# Altium PCB PCB1.PcbDoc
Units mm, origin at the board's own origin, x right, y up, seen from the top; angles counter-clockwise.
Board outline 89.79 x 66.55 mm, 2 copper layers (Top Layer, Bottom Layer); 40 components, 43 nets, 176 pads, 86 vias.
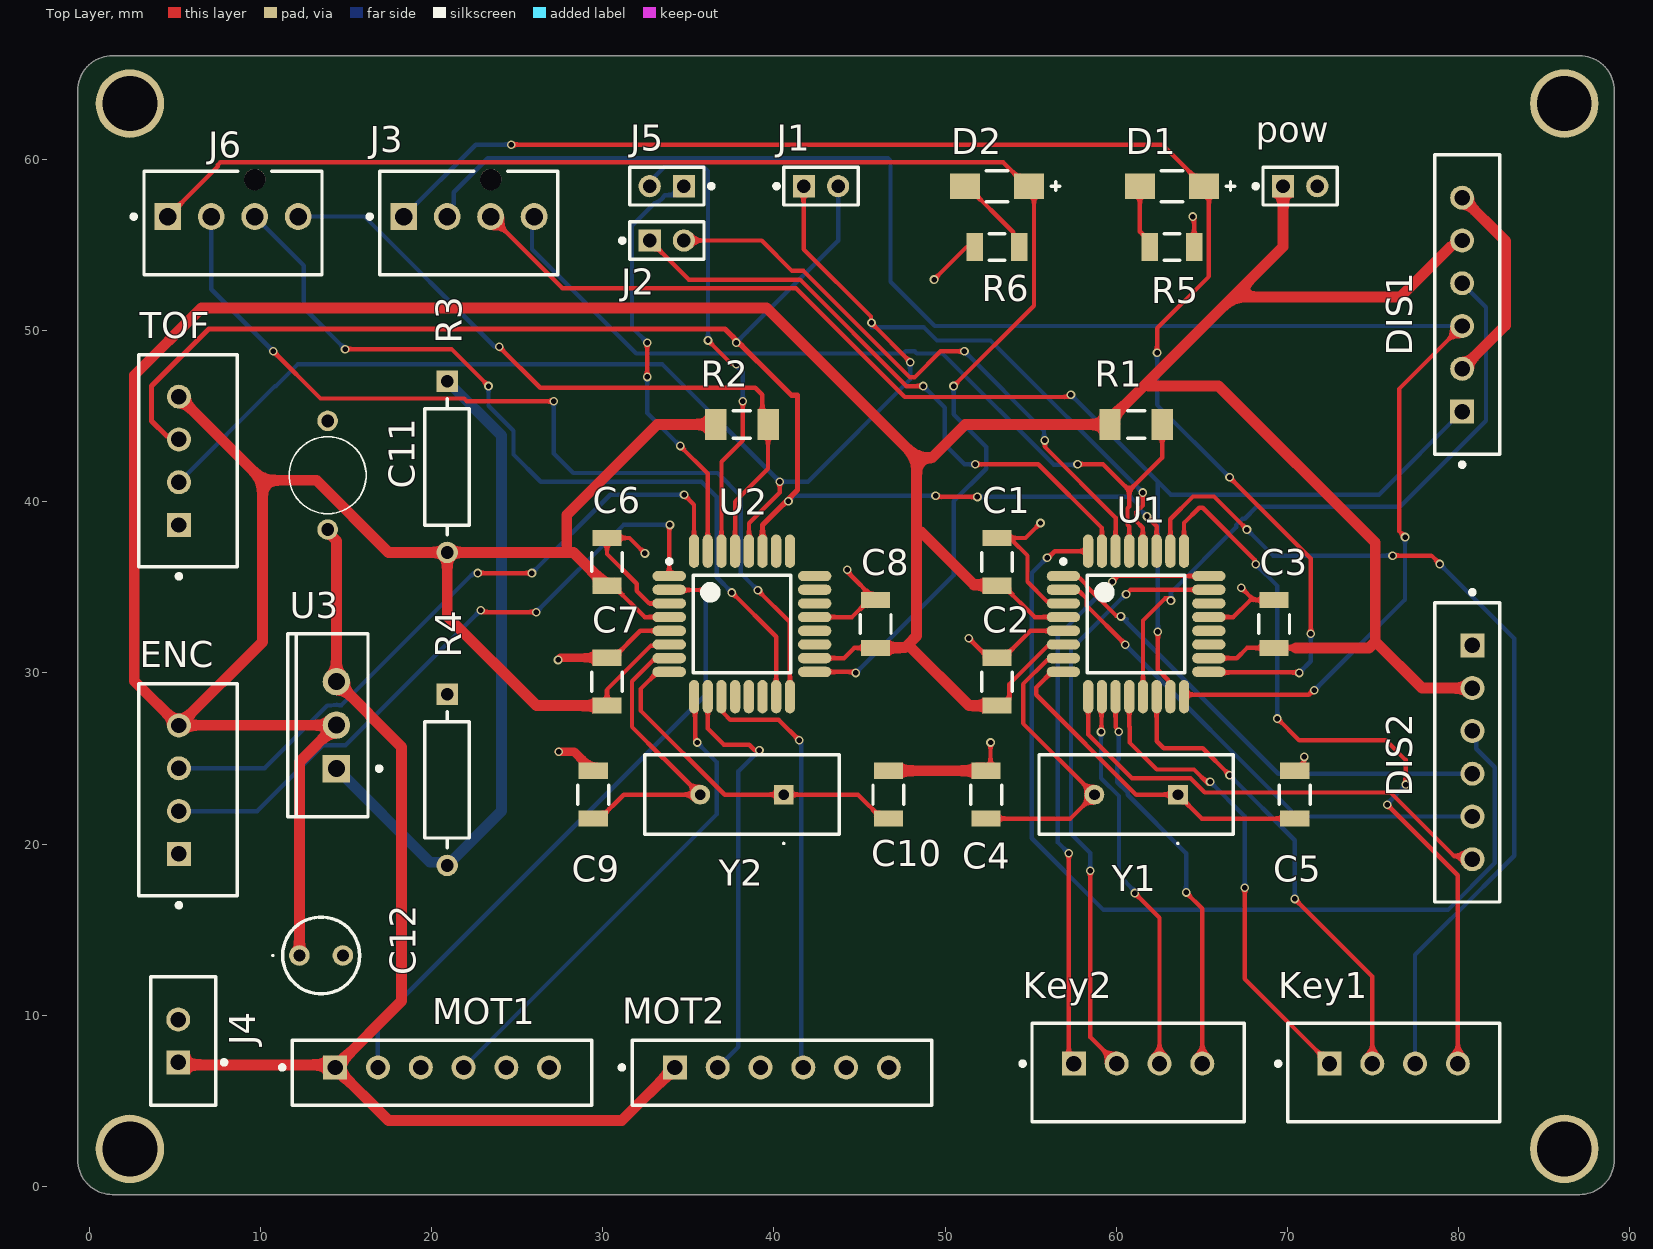
[diagram p0: Top Layer view]
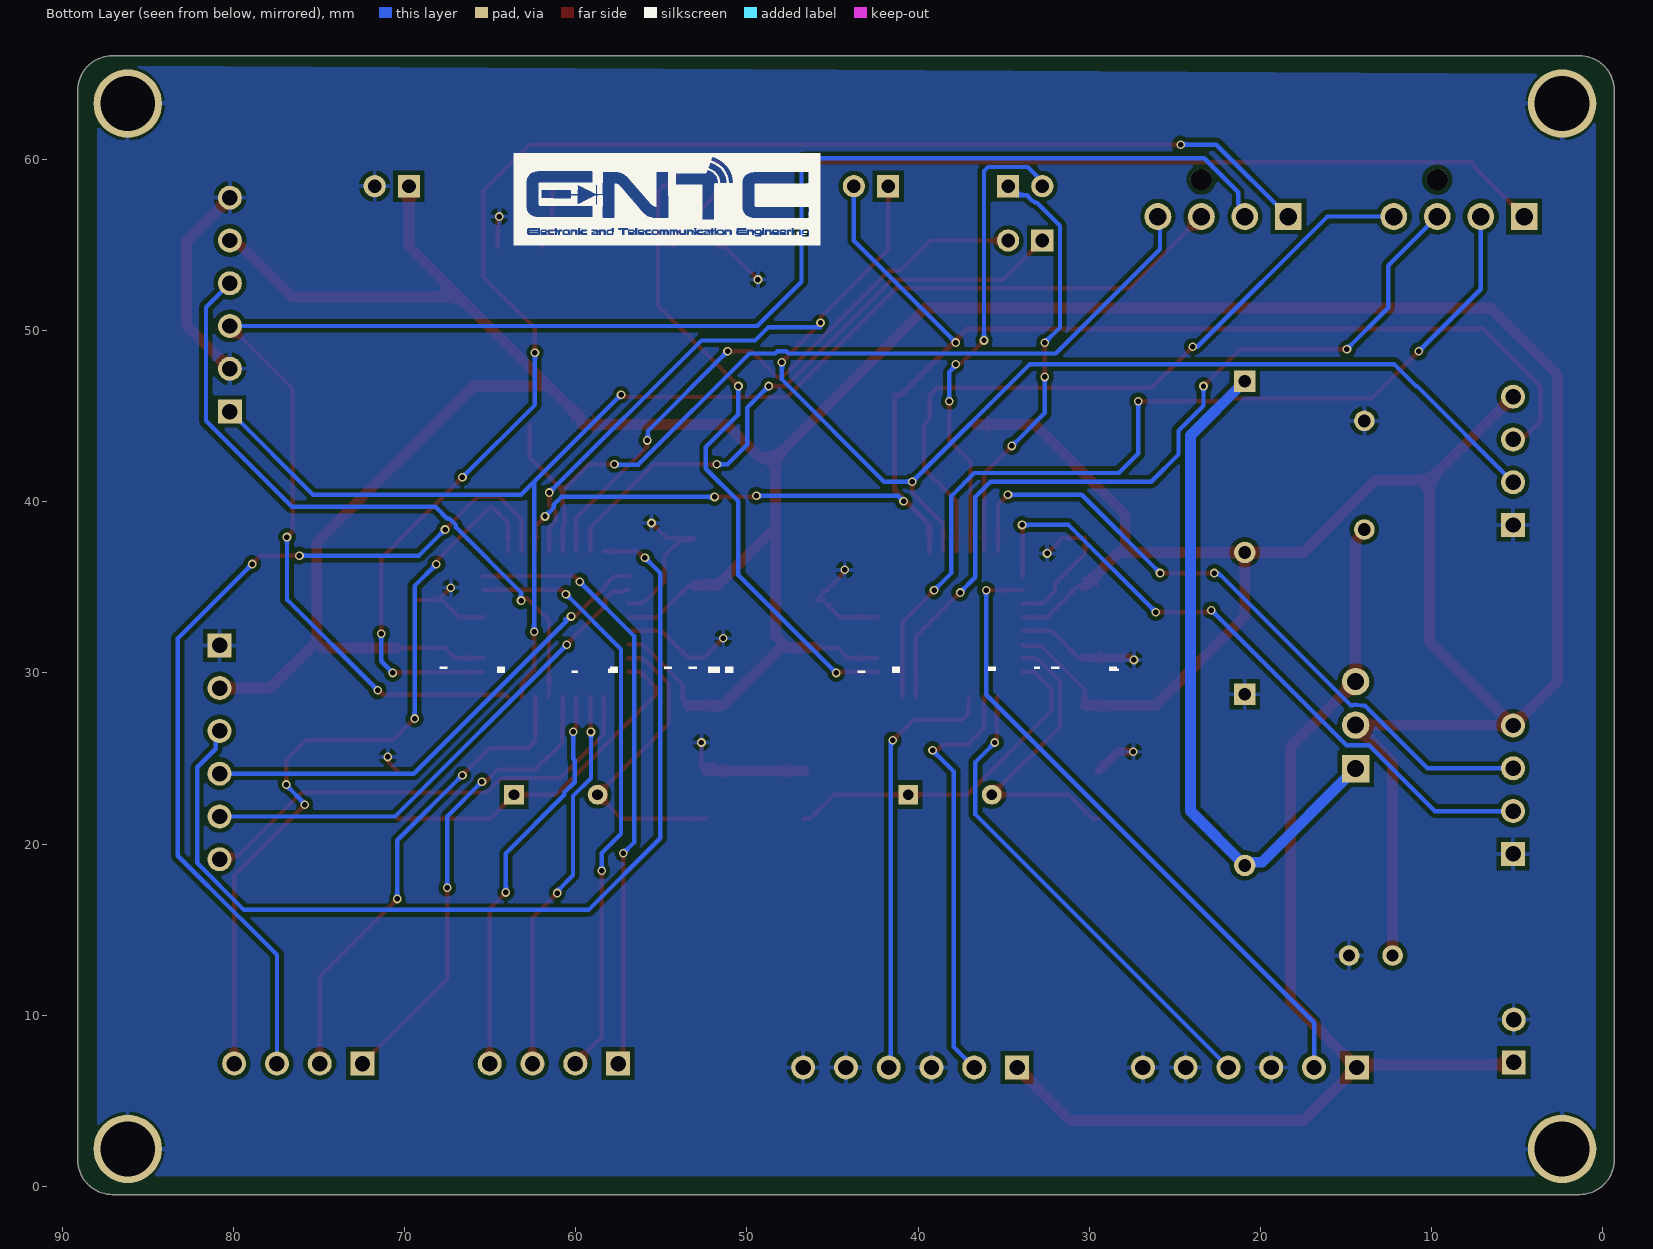
[diagram p1: Bottom Layer view, seen from below]
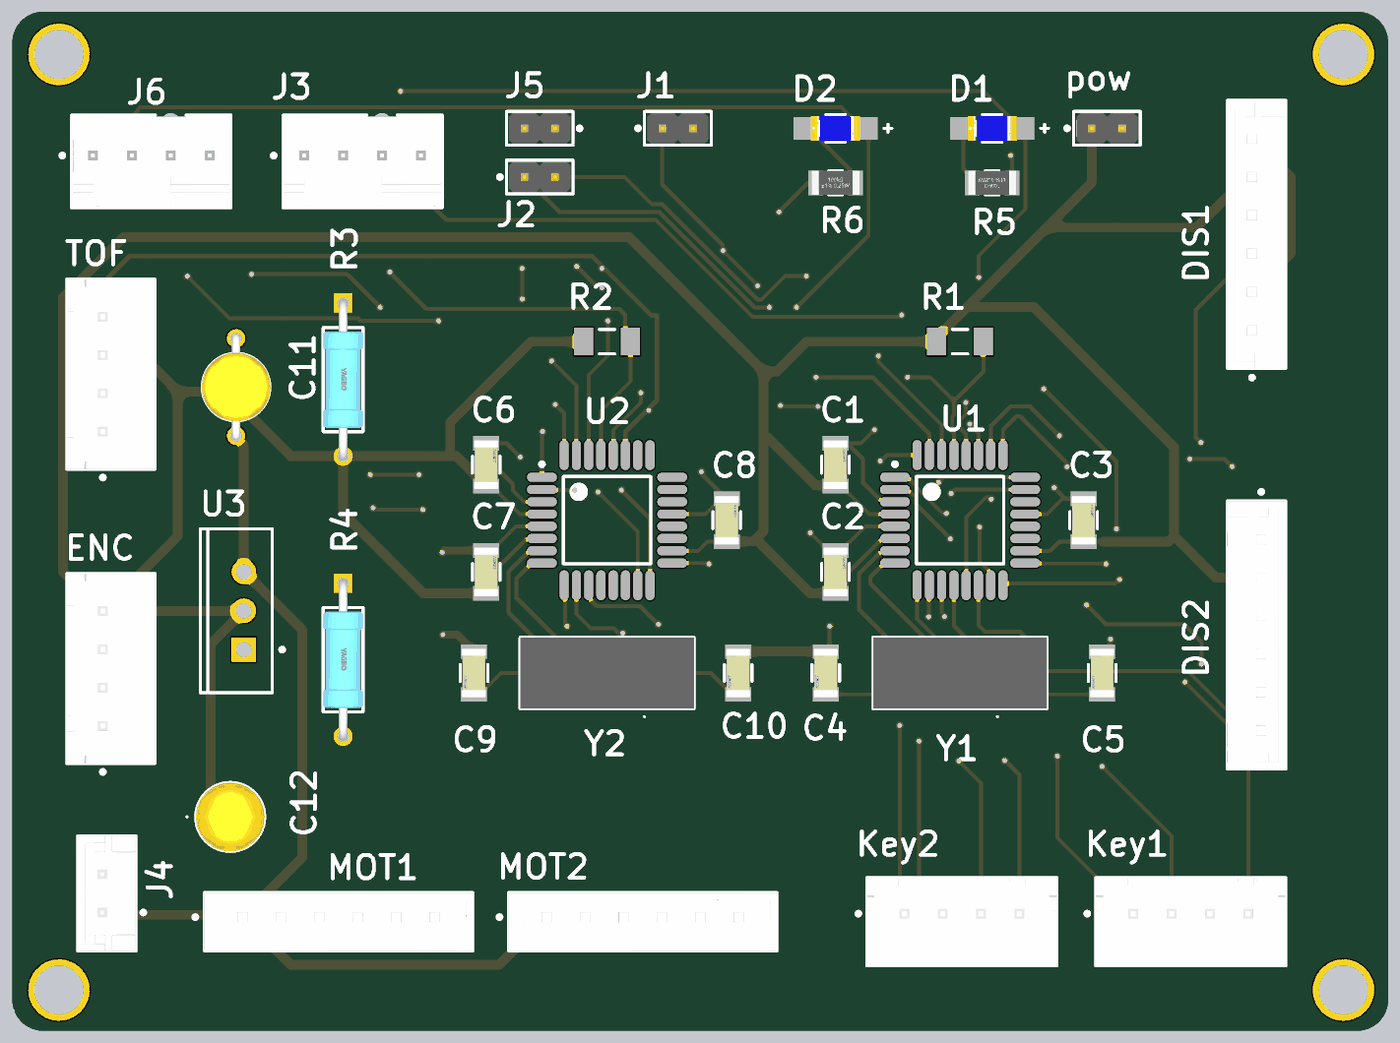
[diagram p2: 3D render of the assembled board from above, using the file's embedded part models]

## Layer stack, top to bottom
Top Solder: solder mask 0.0102, Solder Resist, Dk 3.5
Top Layer: signal copper 0.0356
Dielectric 1: dielectric 0.32, FR-4, Dk 4.8
Bottom Layer: signal copper 0.0356
Bottom Solder: solder mask 0.0102, Solder Resist, Dk 3.5

## Board outline
-0.684,1.551 -0.684,64.035 cw(c1.348,64.035) 1.348,66.067 87.073,66.067 cw(c87.073,64.035) 89.105,64.035 89.105,1.551 cw(c87.073,1.551) 87.073,-0.481 1.348,-0.481 cw(c1.348,1.551)

## Design rules (kind name [scope] priority, off if disabled: settings)
Clearance [All] p1: gap=0.254 ignorepadtopadclearanceinfootprint=TRUE except(0: Arc-Hole Track-Hole SMDPad-Hole THPad-Hole Via-Hole Fill-Hole Poly-Hole Region-Hole Text-Hole)
PolygonConnect [All] p1: connectstyle=Relief reliefconductorwidth=0.254 reliefentries=4 polygonreliefangle="90 Angle" airgapwidth=0.254
RoutingVias [All] p1: holewidth=0.254 width=0.508 viastyle="Through Hole" minholewidth=0.254 minwidth=0.508 maxholewidth=3.251 maxwidth=3.81
SolderMaskExpansion [All] p1: expansion=0.102 istentingtop=FALSE
Width [InNet('NetC11_1')] p1: maxlimit=0.635 minlimit=0.635 preferedwidth=0.635 minimp=50.000000 maximp=50.000000 favimp=50.000000
30 further rules are at their usual default settings.

## Classes and differential pairs
component class power: C11 C12 J4 pow R3 R4 U3
component class slave: C6 C7 C8 C9 C10 D2 ENC J5 J6 MOT1 MOT2 R2 R6 U2 Y2
component class master: C1 C2 C3 C4 C5 D1 DIS1 DIS2 J1 J2 J3 Key1 Key2 R1 R5 TOF U1 Y1

## Components (designator, comment, footprint, x,y, rotation, side; value= is the part's Value field where it differs from the comment)
C1 "C1206C224J5RACTU" FP-C1206C-EB-MFG 53.037,36.488 r270 top value="0.22 μF"
C2 "C1206C224J5RACTU" FP-C1206C-EB-MFG 53.037,29.491 r270 top value="0.22 μF"
C3 "C1206C224J5RACTU" FP-C1206C-EB-MFG 69.226,32.863 r270 top value="0.22 μF"
C4 "22pf" FP-C1206C-EB-MFG 52.402,22.887 r90 top value="22 pF"
C5 "22pf" FP-C1206C-EB-MFG 70.436,22.887 r90 top value="22 pF"
C6 "C1206C224J5RACTU" FP-C1206C-EB-MFG 30.244,36.488 r270 top value="0.22 μF"
C7 "C1206C224J5RACTU" FP-C1206C-EB-MFG 30.244,29.491 r270 top value="0.22 μF"
C8 "C1206C224J5RACTU" FP-C1206C-EB-MFG 45.939,32.863 r270 top value="0.22 μF"
C9 "22pf" FP-C1206C-EB-MFG 29.442,22.887 r90 top value="22 pF"
C10 "22pf" FP-C1206C-EB-MFG 46.687,22.887 r90 top value="22 pF"
C11 "T354A105J035AT7301" T354A105J035AT7301 13.921,38.381 r90 top
C12 "T350A104K050AT" T350A104K050AT 12.27,13.489 r0 top
D1 "KP-3216PBC-A" FP-KP-3216PBC-A-MFG 63.256,58.447 r180 top
D2 "KP-3216PBC-A" FP-KP-3216PBC-A-MFG 53.037,58.447 r180 top
DIS1 "B6B-EH-A(LF)(SN)" FP-B6B-EH-A_LF_SN-MFG 80.515,51.523 r90 top
DIS2 "B6B-EH-A(LF)(SN)" FP-B6B-EH-A_LF_SN-MFG 80.515,25.363 r270 top
ENC "B4B-XH-A(LF)(SN)" FP-B4B-XH-A_LF_SN-MFG 5.752,23.178 r270 top
J1 "1-TX 2-RX" FP-M22-2010205-MFG 42.75,58.447 r0 top
J2 "1-TX 2-RX" FP-M22-2010205-MFG 33.736,55.269 r0 top
J3 "47053-1000" FP-470531000-MFG 22.176,56.289 r180 top
J4 "B2B-EH-A(LF)(SN)" FP-B2B-EH-A_LF_SN-MFG 5.489,8.495 r90 top
J5 "1-TX 2-RX" FP-M22-2010205-MFG 33.736,58.447 r180 top
J6 "47053-1000" FP-470531000-MFG 8.388,56.289 r180 top
Key1 "B4B-XH-A(LF)(SN)" FP-B4B-XH-A_LF_SN-MFG 76.215,6.645 r180 top
Key2 "B4B-XH-A(LF)(SN)" FP-B4B-XH-A_LF_SN-MFG 61.28,6.645 r180 top
MOT1 "B6B-EH-A(LF)(SN)" FP-B6B-EH-A_LF_SN-MFG 20.612,6.645 r0 top
MOT2 "B6B-EH-A(LF)(SN)" FP-B6B-EH-A_LF_SN-MFG 40.464,6.645 r0 top
pow "1-TX 2-RX" FP-M22-2010205-MFG 70.752,58.447 r0 top
R1 "RC1206FR-0710KL" RESC3116X65X40ML10T20 61.164,44.521 r180 top
R2 "RC1206FR-0710KL" RESC3116X65X40ML10T20 38.131,44.521 r180 top
R3 "MFR-25FBF52-1K18" FP-MFR-25-MFG 20.906,42.042 r270 top value=1.18kΩ
R4 "MFR-25FBF52-1K18" FP-MFR-25-MFG 20.906,23.753 r270 top value=1.18kΩ
R5 "CRGCQ1206F220R" FP-CRGCQ1206-IPC_C 63.256,54.891 r180 top value=220Ω
R6 "CRGCQ1206F220R" FP-CRGCQ1206-IPC_C 53.037,54.891 r0 top value=220Ω
TOF "B4B-XH-A(LF)(SN)" FP-B4B-XH-A_LF_SN-MFG 5.752,42.395 r270 top
U1 "ATmega328P-AU" 32A_M 61.164,32.863 r0 top
U2 "ATmega328P-AU" 32A_M 38.131,32.863 r0 top
U3 "LM317T" NDE0003A 14.429,26.951 r90 top
Y1 "ECS-160-S-4" ECS160S4 63.604,22.887 r180 top
Y2 "ECS-160-S-4" ECS160S4 40.571,22.887 r180 top

## Footprints (in the part's own frame and the unit in brackets; to place one, negate y for a bottom-side part, rotate by r counter-clockwise, add the part's x,y. Pads: shape width x height; smd on the part's side, far side on the other; paste and mask are expansions set on the pad)
32A_M [mm] "Thin QFP, 32-Leads, Body 7x7mm, Pitch 0.8mm, IPC Low Density"
  oval 1.95x0.6 smd: 1(-4.25,2.8) 2(-4.25,2) 3(-4.25,1.2) 4(-4.25,0.4) 5(-4.25,-0.4) 6(-4.25,-1.2) 7(-4.25,-2) 8(-4.25,-2.8) 17(4.25,-2.8) 18(4.25,-2) 19(4.25,-1.2) 20(4.25,-0.4) 21(4.25,0.4) 22(4.25,1.2) 23(4.25,2) 24(4.25,2.8)
  oval 0.6x1.95 smd: 9(-2.8,-4.25) 10(-2,-4.25) 11(-1.2,-4.25) 12(-0.4,-4.25) 13(0.4,-4.25) 14(1.2,-4.25) 15(2,-4.25) 16(2.8,-4.25) 25(2.8,4.25) 26(2,4.25) 27(1.2,4.25) 28(0.4,4.25) 29(-0.4,4.25) 30(-1.2,4.25) 31(-2,4.25) 32(-2.8,4.25)
  silkscreen extent -4.37,-2.85 2.85,3.77, body extent -3.5,-3.5 3.5,3.5, height 1.2
ECS160S4 [mm]
  rect 1.155x1.155 hole 0.63: 1(0,0)
  round 1.155 hole 0.63: 2(4.88,0)
  silkscreen extent -3.23,-2.32 8.12,2.9, body extent -3.23,-2.32 8.12,2.32, height 3.6
FP-470531000-MFG [mm]
  rect 1.57x1.57 hole 1.02 paste-1000 mask+0: 1(3.81,-0.38)
  round 1.57 hole 1.02 paste-1000 mask+0: 2(1.27,-0.38) 3(-1.27,-0.38) 4(-3.81,-0.38)
  round 1.25 hole 1.25 unplated paste-1000 mask+0: ""(-1.27,-2.54)
  silkscreen extent -5.2,-3.02 5.92,3.02, body extent -5.3,-3.26 5.3,3.12, height 0.25
FP-B2B-EH-A_LF_SN-MFG [mm]
  rect 1.4x1.4 hole 0.9 paste-1000 mask+0: 1(-1.25,0.3)
  round 1.4 hole 0.9 paste-1000 mask+0: 2(1.25,0.3)
  silkscreen extent -3.75,-2.5 3.75,1.9, body extent -3.85,-2 3.85,2, height 0.25
FP-B4B-XH-A_LF_SN-MFG [mm]
  rect 1.4x1.4 hole 0.9 paste-1000 mask+0: 1(3.75,-0.525)
  round 1.4 hole 0.9 paste-1000 mask+0: 2(1.25,-0.525) 3(-1.25,-0.525) 4(-3.75,-0.525)
  silkscreen extent -6.2,-2.88 6.87,2.88, body extent -6.3,-2.98 6.3,2.98, height 0.25
FP-B6B-EH-A_LF_SN-MFG [mm]
  rect 1.4x1.4 hole 0.9 paste-1000 mask+0: 1(-6.25,0.3)
  round 1.4 hole 0.9 paste-1000 mask+0: 2(-3.75,0.3) 3(-1.25,0.3) 4(1.25,0.3) 5(3.75,0.3) 6(6.25,0.3)
  silkscreen extent -9.47,-1.9 8.75,1.9, body extent -8.85,-2 8.85,2, height 0.25
FP-C1206C-EB-MFG [mm]
  rect 0.95x1.7 smd paste+0 mask+0: 1(-1.4,0) 2(1.4,0)
  silkscreen extent -0.55,-0.9 0.55,0.9, body extent -2,-1 2,1, height 0.25
FP-CRGCQ1206-IPC_C [mm]
  rect 0.956x1.61 smd paste+0 mask+0: 1(-1.301,0) 2(1.301,0)
  silkscreen extent -0.45,-0.77 0.45,0.77, body extent -1.88,-0.95 1.88,0.95, height 0.25
FP-KP-3216PBC-A-MFG [mm]
  rect 1.75x1.5 smd paste+0 mask+0: 1(-1.875,0) 2(1.875,0)
  silkscreen extent -3.67,-0.9 0.63,0.9, body extent -2.85,-1 2.85,1, height 0.25
FP-M22-2010205-MFG [mm]
  rect 1.3x1.3 hole 0.8 paste-1000 mask+0: 1(-1,0)
  round 1.3 hole 0.8 paste-1000 mask+0: 2(1,0)
  silkscreen extent -2.72,-1.1 2.17,1.1, body extent -2.27,-1.2 2.27,1.2, height 0.25
FP-MFR-25-MFG [mm]
  rect 1.25x1.25 hole 0.75 paste-1000 mask+0: 1(-5,0)
  round 1.25 hole 0.75 paste-1000 mask+0: 2(5,0)
  silkscreen extent -3.98,-1.3 3.98,1.3, body extent -5.72,-1.4 5.72,1.4, height 0.25
NDE0003A [mm] "FM, 3-Leads, Body 10.7x4.7mm, Pitch 2.54mm"
  rect 1.6x1.6 hole 1: 1(-2.54,0)
  round 1.6 hole 1: 2(0,0) 3(2.54,0)
  silkscreen extent -5.35,-2.63 5.35,2.85, body extent -5.4,-1.9 5.4,2.9, height 19.4
RESC3116X65X40ML10T20 [mm] "Chip Resistor, 2-Leads, Body 3.10x1.60mm, IPC Low Density"
  rect 1.25x1.8 smd: 1(-1.525,0) 2(1.525,0)
  silkscreen extent -0.5,-0.8 0.5,0.8, body extent -1.6,-0.85 1.6,0.85, height 0.65
T350A104K050AT [mm]
  round 1.2 hole 0.7: 1(0,0) 2(2.54,0)
  silkscreen extent -1.6,-2.25 3.52,2.25, body extent -0.98,-2.25 3.52,2.25, height 7.04
T354A105J035AT7301 [mm]
  round 1.2 hole 0.75: 1(0,0) 2(6.35,0)
  silkscreen extent 0.92,-2.25 5.43,2.25, body extent -0.27,-2.25 6.63,2.25, height 8.63

## Part data
C1 C2 C3 C6 C7 C8: library part CMP-03020-008405-1, "CAP CER 0.22UF 50V X7R 1206", Capacitance="0.22 μF", Manufacturer=KEMET, Package=C1206C-EB, Temperature="-55°C to +150°C", Temperature Characteristic=X7R, Temperature Coefficient=15%, Temperature Range High=+150°C, Temperature Range Low=-55°C, Tolerance=0.05, Voltage Rating="50 V", Automotive=Yes, Automotive Grade="Grade 0", Category=Cap, ComponentLink2Description=Datasheet, ComponentLink2URL=https://content.kemet.com/datasheets/KEM_C1007_X8R_ULTRA_150C_SMD.pdf, Device Class L1="Passive Components", Device Class L2=Capacitors, Device Class L3="Ceramic Capacitors", Digikey Description="CAP CER 0.22UF 50V X7R 1206", Height=0.88mm, Ipc Land Pattern Name=CAPC320160X78, Lead Free=Yes, Manufacturer Part Number=C1206C224J5RACTU, Material=Ceramic, Mouser Description="Multilayer Ceramic Capacitors MLCC - SMD/SMT 50volts 0.22uF X7R 5%", Octopart=https://octopart.com/c1206c224j5ractu-kemet-91653, RoHS=TRUE
C4 C5 C9 C10: library part CMP-1037-00978-2, "1206 22pF Ceramic Multilayer Capacitor; 50VDC; 125degC; C0G Dielec; +/-5% SMD", Capacitance="22 pF", Manufacturer=KEMET, Manufacturer Part Number=C1206C220J5GACTU, Package=C1206C-EB, Temperature="-55°C to +150°C", Temperature Characteristic=C0G, Temperature Coefficient=15%, Temperature Range High=+150°C, Temperature Range Low=-55°C, Tolerance=0.05, Voltage Rating="50 V", Automotive=Yes, Automotive Grade="Grade 0", Category=Cap, ComponentLink2Description=Datasheet, ComponentLink2URL=https://content.kemet.com/datasheets/KEM_C1007_X8R_ULTRA_150C_SMD.pdf, Device Class L1="Passive Components", Device Class L2=Capacitors, Device Class L3="Ceramic Capacitors", Digikey Description="1206 22pF Ceramic Multilayer Capacitor; 50VDC; 125degC; C0G Dielec; +/-5% SMD", Height=0.88mm, Ipc Land Pattern Name=CAPC320160X78, Lead Free=Yes, Material=Ceramic, Mouser Description="1206 22pF Ceramic Multilayer Capacitor; 50VDC; 125degC; C0G Dielec; +/-5% SMD", Octopart=https://octopart.com/c1206c220j5gactu-kemet-131912, RoHS=TRUE
C11: "Capacitor", Manufacturer_Name=KEMET, Mouser Part Number=80-T354A105J35AT-TR, Datasheet Link=https://content.kemet.com/datasheets/KEM_T2043_T35X.pdf, Height=8.6mm, Manufacturer_Part_Number=T354A105J035AT7301, Mouser Price/Stock=https://www.mouser.co.uk/ProductDetail/KEMET/T354A105J035AT7301?qs=eaG68hM7nzPCdlzS1u%252BjMg%3D%3D
C12: "Capacitor", Manufacturer_Name=KEMET, Mouser Part Number=80-T350A104K50AT, Arrow Part Number=T350A104K050AT, Arrow Price/Stock=https://www.arrow.com/en/products/t350a104k050at/kemet-corporation?region=nac, Datasheet Link=https://content.kemet.com/datasheets/KEM_T2043_T35X.pdf, Height=7.1mm, Manufacturer_Part_Number=T350A104K050AT, Mouser Price/Stock=https://www.mouser.co.uk/ProductDetail/KEMET/T350A104K050AT?qs=O4djsYW3Gvb%252Bsic1QYKKdw%3D%3D
D1 D2: library part CMP-44529-000052-1, "LED, Low Power, Blue, SMD, 1.6mm x 2mm, 20 mA, 3.2 V, 470 nm", Case/Package=3216, Color=Blue, Forward Current=20mA, Forward Voltage=3.2V, Lens Color=Clear, Dominant Wavelength=470nm, Lens Style=Rectangular, Luminous Intensity=60mcd, Mount="Surface Mount", Number of LEDs=1, Number of Pins=2, Packaging="Cut Tape", REACH SVHC="No SVHC", RoHS Compliant=No, Series=1206, Viewing Angle=120°, Wavelength=470nm
DIS1 DIS2 MOT1 MOT2: library part CMP-17439-000293-1, "CONN HEADER VERT 6POS 2.5MM", Color=Natural, Current Rating=3A, Flammability Rating="UL94 V-0", Housing Color=White, Voltage Rating=250V, Connector Type=Header, Contact Finish - Mating=TIN, Contact Material=Brass, Contact Mating Length=0.13inch, Contact Plating=Tin, Contact Shape=Square, Contact Type="Male Pin", Fastening Type=Friction, Gender=Male, Insulation Color=Natural, Insulation Material=Nylon, Lead Free="Lead Free", Mated Stacking Heights=8.1mm, Mount="Through Hole", Number of Contacts=6, Number of Positions=6, Number of Rows=1, Orientation=Straight, Packaging=Bulk, Pitch=2.5mm, Series=EH, Termination=Solder
ENC Key1 Key2 TOF: library part CMP-17439-000250-1, "CONN HEADER VERT 4POS 2.5MM", Color=Natural, Contact Resistance=20mR, Current Rating=3A, Flammability Rating="UL94 V-0", Housing Color=White, Insulation Resistance=1GR, Max Operating Temperature=85°C, Max Voltage Rating (AC)=250V, Min Operating Temperature=-25°C, Package Quantity=500, Connector Type=Header, Contact Finish - Mating=TIN, Contact Material=Brass, Contact Plating=Tin, Contact Shape=Square, Contact Type="Male Pin", Depth=5.75mm, Fastening Type=Detent, Gender=Male, Housing Material=Polyamide, Insulation Color=Natural, Insulation Material=Nylon, Lead Free="Lead Free", Lead Pitch=2.5mm, Length=12.4mm, Mated Stacking Heights=9.8mm, Material=Polyamide, Max Current Rating=3A, Max Voltage Rating (DC)=250V, Mount="Through Hole", Number of Contacts=4, Number of Positions=4, Number of Rows=1, Orientation=Straight, Packaging=Bulk, Pitch=2.5mm, REACH SVHC="No SVHC", Series=XH, Termination=Solder, Voltage Rating=250V, Voltage Rating (AC)=250V, Wire/Cable Gauge=22AWG
J1 pow: library part CMP-15831-000101-1, "1-SCL / 2-SDA", Case/Package=SIL, Color=Black, Contact Resistance=20mR, Current Rating=1A, Flammability Rating="UL94 V-0", Insulation Resistance=10GR, Max Operating Temperature=105°C, Min Operating Temperature=-55°C, Package Quantity=1000, Voltage Rating=650V, Voltage Rating (AC)=250V, Connector Type="Male Pin", Contact Finish - Mating=GOLD, Contact Material=Bronze, Contact Mating Length=0.138inch, Contact Plating=Gold, Contact Shape=Square, Contact Type="Male Pin", Depth=2mm, Fastening Type=Pull, Gender=Male, Housing Color=Black, Housing Material=Nylon, Insulation Color=Black, Insulation Material=Nylon, Length=4mm, Mated Stacking Heights=8.6mm, Max Current Rating=1A, Mount="Through Hole", Number of Contacts=2, Number of Positions=2, Number of Rows=1, Orientation=Straight, Packaging=Bulk, Pitch=2mm, Radiation Hardening=No, Reach SVHC Compliant=Yes, Series=M22, Termination=Solder
J2 J5: library part CMP-15831-000101-1, "CONN HEADER VERT 2POS 2MM", Case/Package=SIL, Color=Black, Contact Resistance=20mR, Current Rating=1A, Flammability Rating="UL94 V-0", Insulation Resistance=10GR, Max Operating Temperature=105°C, Min Operating Temperature=-55°C, Package Quantity=1000, Voltage Rating=650V, Voltage Rating (AC)=250V, Connector Type="Male Pin", Contact Finish - Mating=GOLD, Contact Material=Bronze, Contact Mating Length=0.138inch, Contact Plating=Gold, Contact Shape=Square, Contact Type="Male Pin", Depth=2mm, Fastening Type=Pull, Gender=Male, Housing Color=Black, Housing Material=Nylon, Insulation Color=Black, Insulation Material=Nylon, Length=4mm, Mated Stacking Heights=8.6mm, Max Current Rating=1A, Mount="Through Hole", Number of Contacts=2, Number of Positions=2, Number of Rows=1, Orientation=Straight, Packaging=Bulk, Pitch=2mm, Radiation Hardening=No, Reach SVHC Compliant=Yes, Series=M22, Termination=Solder
J3 J6: library part CMP-04776-000290-2, "CONN HEADER VERT 4POS 2.54MM", Ambient Temperature Range High=105°C, Current Rating=500mA, Housing Color=Beige, Manufacturer Lifecycle Status=ACTIVE, Max Operating Temperature=75°C, Min Operating Temperature=0°C, Voltage Rating=250V, Contact Material="Brass, Copper", Contact Plating=Tin, Country of Origin=HK, Depth=5.84mm, Gender=Male, Glow Wire Compliant=Non-compliant, Halogen Free="Low Halogen", Height=7.7mm, Housing Material=Nylon, Lead Pitch=2.54mm, Length=10.2mm, Lifecycle Status=Production, Mount="Through Hole", NexarPartId=854935, Number of Circuits=4, Number of Contacts=4, Number of Pins=4, Number of Positions=4, Number of Rows=1, Orientation=Vertical, Packaging=Bulk, Pitch=2.54mm, Plating=Copper, Radiation Hardening=No, REACH SVHC=Unknown, RoHS=Compliant, Schedule B="8536694040, 8536694040", Termination="Through Hole", Voltage Rating (DC)=250V
J4: library part CMP-17439-000026-1, "CONN HEADER VERT 2POS 2.5MM", Color=Natural, Contact Resistance=20mR, Current Rating=3A, Housing Color=White, Max Operating Temperature=85°C, Max Voltage Rating (AC)=250V, Min Operating Temperature=-25°C, Connector Type=Plug, Contact Material="Copper Alloy", Contact Mating Length=0.13inch, Contact Plating=Tin, Contact Type="Male Pin", Depth=3.8mm, Fastening Type=Detent, Gender=Male, Housing Material=Nylon, Lead Free="Lead Free", Length=7.5mm, Max Current Rating=3A, Mount="Through Hole", Number of Contacts=2, Number of Positions=2, Number of Rows=1, Orientation=Straight, Packaging=Bulk, Pitch=2.5mm, Series=EH, Termination=Press-Fit, Voltage Rating=250V
R1 R2: library part CMP-1014-00623-2, "Chip Resistor, 10 KOhm, +/- 1%, 0.25 W, -55 to 155 degC, 1206 (3216 Metric), RoHS, Tape and Reel", Case Code (Imperial)=1206, Case Code (Metric)=3216, Manufacturer=Yageo, Max Operating Temperature=155degC, Min Operating Temperature=-55degC, Package Description="2-Pin Surface Mount Device, Body 3.1 x 1.6 mm", Package Quantity=5000, Package Reference=1206.0, Power Rating=250mW, Resistance=10KOhm, Temperature Coefficient=100ppm/degreesC, Tolerance=1%, Voltage Rating=200V, Case/Package=1206, Composition=ThickFilm, Datasheet URL=http://www.yageo.com/NewPortal/yageodocoutput?fileName=/pdf/R-Chip/PYu-RC_Group_51_RoHS_L_5.pdf, Datasheet Version="Rev. 5, 10/2016", Depth=1.6mm, Height=0.55mm, Lead Free=LeadFree, Length=3.1mm, Manufacturer URL=http://www.yageo.com/, Military Standard=Not, Packaging=TapeandReel, REACH SVHC=Unknown, RoHSCompliant=true, Termination=SMD/SMT, Width=1.6mm
R3 R4: library part CMP-03413-000001-1, "RES 1.18K OHM 1/4W 1% AXIAL", Manufacturer=Yageo, Package=MFR-25, Power Rating=0.25W, Resistance=1.18kΩ, Temperature="-55°C to +155°C", Temperature Coefficient=100ppm/°C, Temperature Range High=+155°C, Temperature Range Low=-55°C, Tolerance=1%, Voltage Rating=250V, Automotive=No, Category=Res, ComponentLink2Description=Datasheet, ComponentLink2URL=https://www.yageo.com/upload/media/product/products/datasheet/lr/Yageo_LR_MFR_1.pdf, Composition="Metal Film", Device Class L1="Passive Components", Device Class L2=Resistors, Device Class L3="Through-Hole Resistors", Digikey Description="RES 1.18K OHM 1/4W 1% AXIAL", Height=2.6mm, Ipc Land Pattern Name=RESAD1000W75L680D260, Lead Free=Yes, Manufacturer Part Number=MFR-25FBF52-1K18, Mouser Description="Metal Film Resistors 1.18K OHM 1/4W 1%", Octopart=https://octopart.com/mfr-25fbf52-1k18-yageo-56251681, RoHS=TRUE, Series=MFR
R5 R6: library part CMP-03211-008395-1, "CRGCQ1206 220Ω 0.25W 1% ±100ppm/°C 200V", Ambient Temperature Range High=+70°C, Manufacturer="TE Connectivity", Package=CRGCQ1206, Power Rating=0.25W, Resistance=220Ω, Temperature="-55°C to +155°C", Temperature Coefficient=±100ppm/°C, Temperature Range High=+155°C, Temperature Range Low=-55°C, Tolerance=0.01, Voltage Rating=200V, Automotive=Yes, Automotive Grade="Grade 529", Category=Res, ComponentLink2Description=Datasheet, ComponentLink2URL=https://www.te.com/commerce/DocumentDelivery/DDEController?Action=showdoc&DocId=Data+Sheet%7F1773204-3%7F1%7Fpdf%7FEnglish%7FENG_DS_1773204-3_1.pdf%7F4-2176347-538, Composition="Thick Film", Device Class L1="Passive Components", Device Class L2=Resistors, Device Class L3="Chip SMD Resistors", Height=0.65mm, Ipc Land Pattern Name=RESC310155X55, Lead Free=Yes, Manufacturer Part Number=CRGCQ1206F220R, Octopart=https://octopart.com/crgcq1206f220r-te+connectivity-91018264, RoHS=TRUE, Series=CRGCQ
U1 U2: library part CMP-0095-00269-2, "8-bit AVR Microcontroller, 32KB Flash, 1KB EEPROM, 2KB SRAM, 32-pin TQFP, Industrial Grade (-40°C to 85°C)", Code_JEDEC=MS-026-ABA, ComponentLink1Description="Manufacturer URL", ComponentLink1URL=http://www.atmel.com/, ComponentLink2Description="ATmega48A/48PA/88A/88PA/168A/168PA/328/328P Datasheet", ComponentLink2URL=http://www.atmel.com/dyn/resources/prod_documents/doc8271.pdf, ComponentLink3Description="ATmega48A/48PA/88A/88PA/168A/168PA/328/328P Summary", ComponentLink3URL=http://www.atmel.com/dyn/resources/prod_documents/8271S.pdf, DatasheetVersion="revD, May-2011", PackageDescription="32-Lead, 7x7x1.0 mm Body, 0.8mm Lead Pitch, Thin Profile Plastic Quad Flat Package (TQFP)", PackageReference=32A, PackageVersion="revC, Oct-2010", RevisionNote="DatasheetVersion & PackageVersion updated. URLs added."
U3: library part CMP-0062-02456-3, "3-Terminal Adjustable Regulator, 3-pin TO-220", Manufacturer="Texas Instruments", PackageTopMarking="NSUZXYTTE#*LM317T P+", PowerWise=N, ComponentLink1Description="Datasheet URL", ComponentLink1URL=http://www.ti.com/general/docs/lit/getliterature.tsp?genericPartNumber=LM317-N&fileType=pdf, CompType="LDO IC", PackageDescription="TO-220, Molded, 3 Lead, Straight", PackageReference=NDE0003A, PinCount=3, RoHS=N
Y1 Y2: "Crystal or Oscillator", Manufacturer_Name=ECS, Mouser Part Number=520-HCU1600-S, Datasheet Link=http://www.ecsxtal.com/store/pdf/hc_49us.pdf, Height=3.5mm, Manufacturer_Part_Number=ECS-160-S-4, Mouser Price/Stock=https://www.mouser.co.uk/ProductDetail/ECS/ECS-160-S-4?qs=CNVyLAqdhH0J%2FZuif68kGw%3D%3D

## Free pads (board coordinates)
  round 1.524 hole 0.762: 3(86.184,2.186)
  round 4 hole 3.2 unplated paste+0: 4(2.364,2.186) 4(2.364,63.273) 4(86.184,2.186) 4(86.184,63.273)

## Via types
v1: diameter 0.508, hole 0.32, Top Layer to Bottom Layer, tented both sides, 82 vias
v2: diameter 3.81, hole 3.2, Top Layer to Bottom Layer, 4 vias

## Nets (pads, with @x,y where several pads share a name; then routed paths per layer and width w, separated by ;. In a path a pad name is that pad's centre, name@x,y a point inside that pad or via, vN(x,y) a via of type N, cw(c..) or ccw(c..) an arc to the next point about the centre after c; other vN are vias at no path point)
GND: C1.1 C2.1 C3.1 C4.2 C5.2 C6.1 C7.1 C8.1 C9.2 C10.2 C11.2 C12.2 DIS1.2 DIS1.6 DIS2.1 ENC.1 J4.2 MOT1.3 MOT1.5 MOT1.6 MOT2.3 MOT2.5 MOT2.6 pad.3 pad.4 pow.2 R4.1 R5.1 R6.1 TOF.1 U1.3 U1.5 U1.21 U2.3 U2.5 U2.21 | length 72.1
  Top Layer w0.254: v1(27.383,30.761) v1@27.513,30.891 ; C7.1 30.619,30.891 32.191,32.463 U2.5 ; v1(32.463,36.984) 31.559,37.888 C6.1 30.244,36.952 31.984,35.212 31.984,34.796 32.717,34.063 U2.3 ; U2.21 44.564,33.263 45.564,34.263 C8.1 44.283,35.919 v1(44.283,36.024) ; v1(49.354,52.986) 51.259,54.891 R6.1 ; v1(51.386,32.031) 52.526,30.891 C2.1 53.412,30.891 54.984,32.463 U1.5 ; C4.2@52.027,24.287 52.394,24.287 C4.2 52.656,24.541 v1(52.656,25.935) ; v1(55.577,38.762) 54.703,37.888 C1.1 53.179,37.746 53.926,37.746 54.815,36.857 54.815,35.325 55.957,34.182 56.027,34.182 56.146,34.063 U1.3 ; v1(64.467,56.669) 64.557,56.579 R5.1 ; U1.21 66.843,33.263 67.843,34.263 68.025,34.263 ; v1(67.302,34.986) 68.025,34.263 ; C3.1 68.025,34.263 ; C5.2 70.983,24.834 v1(70.983,25.092)
  Top Layer w0.508: v1(27.419,25.394) 28.336,25.394 C9.2 ; v1@27.513,30.891 C7.1
  Top Layer w0.635: C10.2 C4.2@52.027,24.287 ; C4.2@51.869,24.445 52.237,24.445 C4.2@52.394,24.287 ; DIS1.2 82.755,50.313 82.755,55.233 DIS1.6
  other v2: 2.364,2.186 86.184,2.186 2.364,63.273 86.184,63.273
NetC4_1: C4.1 U1.7 Y1.2 | length 18.1
  Top Layer w0.254: C4.1 57.324,21.487 Y1.2 54.561,27.051 54.561,29.348 55.957,30.744 56.027,30.744 56.146,30.863 U1.7
NetC5_1: C5.1 U1.8 Y1.1 | length 20.5
  Top Layer w0.254: U1.8 56.239,30.063 55.323,29.147 55.323,28.729 61.165,22.887 Y1.1 65.004,21.487 C5.1
NetC9_1: C9.1 U2.7 Y2.2 | length 17.9
  Top Layer w0.254: C9.1 29.817,21.487 31.217,22.887 Y2.2 33.565,25.014 33.533,25.014 31.701,26.846 31.701,29.521 32.924,30.744 32.994,30.744 33.113,30.863 U2.7
NetC10_1: C10.1 U2.8 Y2.1 | length 20.4
  Top Layer w0.254: U2.8 33.206,30.063 32.209,29.066 32.209,27.801 37.122,22.887 Y2.1 44.912,22.887 46.312,21.487 C10.1
NetC11_1: C11.1 J4.1 MOT1.1 MOT2.1 U3.3 | length 66.6
  Top Layer w0.635: J4.1 5.339,7.095 14.212,7.095 MOT1.1 ; C11.1 13.921,38.229 14.429,37.721 U3.3 18.239,25.681 18.239,10.822 MOT1.1 ; MOT2.1 31.106,3.837 17.47,3.837 MOT1.1
NetD1_1: D1.1 J3.1 U1.17 | length 88.6
  Top Layer w0.254: v1(24.655,60.872) 62.706,60.872 65.416,58.162 65.416,53.174 62.389,50.147 v1(62.389,48.714) ; U1.17 65.446,30.031 70.658,30.031 v1(70.69,29.999) ; v1(66.626,41.429) 71.371,36.684 v1(71.371,32.289)
  Bottom Layer w0.254: J3.1 22.569,60.872 v1(24.655,60.872) ; v1(62.389,48.714) 62.389,45.666 v1(66.626,41.429) ; v1(70.69,29.999) 71.371,30.681 v1(71.371,32.289)
NetD1_2: D1.2 R5.2 | length 3.8
  Top Layer w0.254: D1.2 61.381,55.792 61.955,55.218 R5.2
NetD2_1: D2.1 J6.1 U2.17 | length 89.2
  Top Layer w0.254: J6.1 5.236,57.327 7.503,59.595 7.503,59.687 7.652,59.835 53.399,59.835 54.787,58.447 D2.1 55.197,58.162 55.197,51.464 v1(50.497,46.763) ; U2.17 44.718,30.063 v1(44.782,29.999)
  Bottom Layer w0.254: v1(44.782,29.999) 50.497,35.714 50.497,40.032 52.402,41.937 52.402,43.207 50.497,45.112 v1(50.497,46.763)
NetD2_2: D2.2 R6.2 | length 4.9
  Top Layer w0.254: D2.2 51.287,58.447 53.987,55.747 53.987,55.242 R6.2
NetDIS1_1: DIS1.1 J3.3 U1.15 | length 78.5
  Top Layer w0.254: J3.3 27.637,52.478 41.289,52.478 47.639,46.128 57.159,46.128 57.286,46.255 v1(57.355,46.255) ; v1(62.435,32.412) 62.435,30.181 63.045,29.571 63.045,29.501 63.164,29.382 U1.15
  Bottom Layer w0.254: v1(57.355,46.255) 62.435,41.175 ; v1(62.435,32.412) 62.435,41.175 ; DIS1.1 75.355,40.413 63.197,40.413 62.435,41.175
NetDIS1_3: DIS1.3 J3.2 U1.16 | length 102.5
  Top Layer w0.254: U1.16 64.008,28.613 64.124,28.729 71.256,28.729 71.51,28.983 v1(71.579,28.983) ; v1(76.879,37.941) 76.532,38.289 76.532,46.59 DIS1.3
  Bottom Layer w0.254: J3.2 20.906,57.026 21.287,57.407 21.287,58.093 23.27,60.077 46.665,60.077 46.814,59.928 46.814,52.859 49.4,50.273 DIS1.3 ; v1(71.579,28.983) 76.879,34.284 v1(76.879,37.941)
NetDIS1_4: DIS1.4 U1.13 | length 38.4
  Top Layer w0.254: U1.13 61.564,33.066 62.854,34.355 63.07,34.355 v1(63.197,34.228)
  Bottom Layer w0.254: v1(63.197,34.228) 63.197,34.698 67.007,38.508 67.007,38.644 67.379,39.016 67.515,39.016 68.207,39.708 76.588,39.708 81.612,44.732 81.612,51.376 DIS1.4
NetDIS2_3: DIS2.3 U1.32 | length 57.5
  Top Layer w0.254: v1(55.958,36.73) 56.026,36.73 56.409,37.113 U1.32
  Bottom Layer w0.254: v1(55.958,36.73) 55.07,35.843 55.07,20.346 59.261,16.155 79.385,16.155 82.12,18.89 82.12,24.49 81.034,25.576 81.034,26.394 DIS2.3
NetDIS2_4: DIS2.4 U1.1 | length 28.8
  Top Layer w0.254: U1.1 57.66,35.663 57.779,35.544 57.872,35.544 58.27,35.146 58.27,35.064 59.984,33.35 60.227,33.35 v1(60.276,33.301)
  Bottom Layer w0.254: v1(60.276,33.301) 60.344,33.301 60.506,33.14 60.622,33.14 ; 60.53,33.047 69.464,24.113 DIS2.4
NetDIS2_5: DIS2.5 U1.2 | length 29.6
  Top Layer w0.254: U1.2 57.19,34.863 57.309,34.744 57.872,34.744 58.27,34.346 58.27,33.936 60.53,31.677 v1(60.53,31.65)
  Bottom Layer w0.254: v1(60.53,31.65) 70.567,21.613 DIS2.5
NetDIS2_6: DIS2.6 U1.9 | length 27.7
  Top Layer w0.254: U1.9 58.364,26.406 60.925,23.846 64.34,23.846 65.171,23.014 76.021,23.014 79.734,19.302 80.626,19.302 DIS2.6
NetENC_2: ENC.2 U2.1 | length 38.7
  Top Layer w0.254: v1(22.86,33.666) 22.97,33.555 v1(26.113,33.555) ; U2.1 33.881,38.61 v1(33.922,38.651)
  Bottom Layer w0.254: ENC.2 9.806,21.928 13.649,25.77 14.964,25.77 v1(22.86,33.666) ; v1(26.113,33.555) 31.208,38.651 v1(33.922,38.651)
NetENC_3: ENC.3 U2.32 | length 39.7
  Top Layer w0.254: v1(22.684,35.835) v1(25.859,35.835) ; v1(34.749,40.413) 35.331,39.831 U2.32
  Bottom Layer w0.254: ENC.3 10.235,24.428 13.901,28.094 14.131,28.094 cw(c14.429,26.951) 14.604,28.119 14.622,28.119 14.728,28.119 22.444,35.835 v1(22.684,35.835) ; v1(25.859,35.835) 30.437,40.413 v1(34.749,40.413)
NetJ1_1: J1.1 TOF.2 U1.28 U2.28 | length 93.5
  Top Layer w0.254: U2.28 38.545,37.127 38.545,38.749 40.337,40.54 v1(40.337,41.175) ; J1.1 41.734,58.431 41.734,54.764 45.671,50.827 45.671,50.495 v1(45.7,50.466) 45.7,50.442 47.957,48.185 v1(47.957,48.16) ; v1(61.546,40.54) 61.546,39.787 61.165,39.406 61.165,38.88 61.555,38.49 61.555,37.123 U1.28
  Bottom Layer w0.254: TOF.2 10.845,46.763 10.894,46.763 12.179,48.048 33.464,48.048 v1(40.337,41.175) 41.988,41.175 47.957,47.144 v1(47.957,48.16) ; v1(45.7,50.466) 45.7,50.192 48.762,50.192 49.524,49.43 52.656,49.43 v1(61.546,40.54)
NetJ1_2: J1.2 TOF.3 U1.27 U2.27 | length 90.5
  Top Layer w0.254: 4.501,43.864 5.007,43.864 TOF.3 ; v1(49.446,40.352) 49.446,40.378 49.481,40.413 49.608,40.286 v1(51.894,40.286) ; v1(61.8,39.143) 62.364,38.579 U1.27
  Top Layer w0.305: 4.501,43.864 3.634,44.731 3.634,46.763 6.975,50.105 37.146,50.105 41.021,46.23 41.378,46.23 41.378,40.693 39.331,38.646 U2.27 ; v1(37.8,49.307) v1@37.8,49.451
  Bottom Layer w0.254: v1(37.8,49.307) 38.432,49.938 43.75,55.256 J1.2 ; v1(40.845,40.032) 41.164,40.352 v1(49.446,40.352) ; v1(51.894,40.286) 60.842,40.286 61.296,39.832 61.296,39.647 v1(61.8,39.143)
NetJ2_1: J2.1 U1.31 | length 36
  Top Layer w0.254: J2.1 35.019,52.986 41.514,52.986 47.737,46.763 v1(48.719,46.763) ; v1(51.758,42.191) 55.45,42.191 59.164,38.477 U1.31
  Bottom Layer w0.254: v1(48.719,46.763) 49.989,45.493 49.989,43.334 51.132,42.191 v1(51.758,42.191)
NetJ2_2: J2.2 U1.30 | length 35.7
  Top Layer w0.254: J2.2 39.281,55.269 41.055,53.494 41.725,53.494 47.948,47.271 48.211,47.271 49.735,48.795 v1(51.132,48.795) ; v1(55.831,43.588) 55.835,43.584 55.835,43.203 59.964,39.074 U1.30
  Bottom Layer w0.254: v1(51.132,48.795) 55.782,44.145 55.782,43.637 v1(55.831,43.588)
NetJ3_4: J3.4 R1.1 U1.29 | length 51.1
  Top Layer w0.254: v1(57.74,42.196) 59.226,42.196 60.764,40.657 ; U1.29 60.764,38.562 60.657,38.67 60.657,39.617 60.764,39.725 60.764,40.657 ; R1.1 62.689,42.582 60.764,40.657
  Bottom Layer w0.254: J3.4 25.859,56.542 25.859,54.764 31.955,48.668 47.567,48.668 47.694,48.795 48.22,48.795 48.347,48.668 49.853,48.668 56.359,42.162 57.706,42.162 v1(57.74,42.196)
NetJ5_1: J5.1 U2.31 | length 24.8
  Top Layer w0.254: v1(32.59,49.303) 32.593,49.3 v1(32.593,47.299) ; v1(34.517,43.266) 36.131,41.652 U2.31
  Bottom Layer w0.254: v1(32.59,49.303) 31.705,50.188 31.705,56.136 33.028,57.459 ccw(c32.736,58.447) 33.625,57.924 34.213,57.924 J5.1 ; v1(32.593,47.299) 32.593,45.191 v1(34.517,43.266)
NetJ5_2: J5.2 U2.30 | length 27.9
  Top Layer w0.254: v1(36.146,49.43) 37.494,48.082 37.748,48.082 v1(37.797,48.033) ; U2.30 36.931,42.342 38.178,43.588 v1(38.178,45.874)
  Bottom Layer w0.254: J5.2 32.736,58.721 33.584,59.569 35.913,59.569 36.146,59.336 v1(36.146,49.43) ; v1(37.797,48.033) 37.797,47.965 38.178,47.584 v1(38.178,45.874)
NetJ6_2: J6.2 U2.16 | length 54.9
  Top Layer w0.254: v1(10.746,48.795) 13.505,46.036 21.894,46.036 22.055,45.874 v1(27.129,45.874) ; v1(39.067,34.825) 40.931,32.961 U2.16
  Bottom Layer w0.254: J6.2 7.118,52.423 v1(10.746,48.795) ; v1(27.129,45.874) 27.129,42.826 28.272,41.683 36.715,41.683 38.051,40.348 38.051,35.841 v1(39.067,34.825)
NetJ6_3: J6.3 U2.15 | length 49.8
  Top Layer w0.254: v1(14.937,48.922) 21.16,48.922 v1(23.319,46.763) ; v1(37.543,34.698) 40.131,32.11 U2.15
  Bottom Layer w0.254: J6.3 12.524,53.804 12.524,51.335 v1(14.937,48.922) ; v1(23.319,46.763) 23.319,45.617 24.779,44.156 24.779,42.763 26.367,41.175 35.765,41.175 36.654,40.286 36.654,35.587 v1(37.543,34.698)
NetJ6_4: J6.4 R2.1 U2.29 | length 41.5
  Top Layer w0.254: v1(23.954,49.064) 23.954,49.049 26.339,46.664 38.912,46.664 39.321,46.255 39.321,44.857 R2.1 39.656,41.932 37.731,40.007 U2.29
  Bottom Layer w0.254: J6.4 16.08,56.669 23.685,49.064 v1(23.954,49.064)
NetKey1_1: Key1.1 U1.12 | length 27.9
  Top Layer w0.254: U1.12 60.764,26.867 60.784,26.847 60.784,25.935 62.365,24.354 64.55,24.354 65.382,23.522 65.483,23.522 v1(65.483,23.649) ; v1(67.513,17.449) 67.513,12.122 Key1.1
  Bottom Layer w0.254: v1(65.483,23.649) 67.513,21.619 v1(67.513,17.449)
NetKey1_2: Key1.2 U1.14 | length 28
  Top Layer w0.254: U1.14 62.364,26.006 62.774,25.596 65.06,25.596 v1(66.626,24.03) ; v1(70.436,16.791) 74.965,12.262 Key1.2
  Bottom Layer w0.254: v1(66.626,24.03) 70.436,20.22 v1(70.436,16.791)
NetKey1_3: Key1.3 U1.26 | length 53.2
  Top Layer w0.254: U1.26 63.164,38.986 64.487,40.308 65.715,40.308 v1(67.642,38.381) ; v1(76.151,36.857) 78.42,36.857 v1(78.913,36.365)
  Bottom Layer w0.254: v1(67.642,38.381) 69.166,36.857 v1(76.151,36.857) ; Key1.3 77.465,13.533 79.578,15.647 79.595,15.647 83.263,19.314 83.263,32.015 v1(78.913,36.365)
NetKey1_4: Key1.4 U1.25 | length 45.6
  Top Layer w0.254: U1.25 63.964,38.768 64.847,39.651 65.057,39.651 68.101,36.607 68.101,36.398 v1(68.15,36.349) ; v1(69.42,27.332) 70.69,26.062 75.77,26.062 76.913,24.919 v1(76.913,23.478) ; v1(75.841,22.297) 79.965,18.173 Key1.4
  Bottom Layer w0.254: v1(68.15,36.349) 69.42,35.079 v1(69.42,27.332) ; v1(75.841,22.297) 75.841,22.352 76.913,23.423 v1(76.913,23.478)
NetKey2_1: Key2.1 U1.24 | length 35.6
  Top Layer w0.254: v1(57.228,19.458) 57.228,7.472 Key2.1 ; v1(59.768,35.333) 60.098,35.663 U1.24
  Bottom Layer w0.254: v1(57.228,19.458) 56.593,20.093 56.593,32.158 v1(59.768,35.333)
NetKey2_2: Key2.2 U1.23 | length 34.8
  Top Layer w0.254: v1(58.481,18.44) 58.481,8.719 Key2.2 ; v1(60.576,34.607) 60.832,34.863 U1.23
  Bottom Layer w0.254: v1(58.481,18.44) 58.481,19.477 57.355,20.603 57.355,31.386 v1(60.576,34.607)
NetKey2_3: Key2.3 U1.10 | length 22.9
  Top Layer w0.254: v1(59.115,26.553) 59.14,26.578 59.14,28.589 U1.10 ; v1(61.086,17.137) 62.53,15.694 Key2.3
  Bottom Layer w0.254: v1(59.115,26.553) 59.115,23.852 60.16,22.807 60.16,18.177 61.044,17.293 61.086,17.251 v1(61.086,17.137)
NetKey2_4: Key2.4 U1.11 | length 23.6
  Top Layer w0.254: U1.11 59.964,26.823 60.149,26.639 v1(60.149,26.57) ; v1(64.086,17.172) 65.03,16.229 Key2.4
  Bottom Layer w0.254: v1(60.149,26.57) 60.149,24.974 60.067,24.892 60.067,23.618 60.668,23.018 60.668,22.876 64.086,19.458 v1(64.086,17.172)
NetMOT1_2: MOT1.2 U2.2 | length 38
  Top Layer w0.254: U2.2 33.9,34.844 36,34.844 v1(36.019,34.825)
  Bottom Layer w0.254: MOT1.2 16.842,6.966 16.842,9.552 36.019,28.729 v1(36.019,34.825)
NetMOT1_4: MOT1.4 U2.9 | length 28.3
  Top Layer w0.254: U2.9 35.398,28.547 35.398,26.048 v1(35.511,25.935)
  Bottom Layer w0.254: MOT1.4 36.65,21.733 36.65,24.796 v1(35.511,25.935)
NetMOT2_2: MOT2.2 U2.10 | length 25
  Top Layer w0.254: U2.10 36.131,26.752 37.074,25.808 38.556,25.808 38.879,25.486 v1(39.154,25.486)
  Bottom Layer w0.254: MOT2.2 37.924,8.155 37.924,24.256 v1(39.154,25.486)
NetMOT2_4: MOT2.4 U2.11 | length 25.3
  Top Layer w0.254: U2.11 37.05,28.494 37.05,27.656 37.449,27.257 40.285,27.257 v1(41.48,26.062)
  Bottom Layer w0.254: v1(41.48,26.062) 41.597,25.945 41.597,7.062 MOT2.4
NetR3_1: R3.1 R4.2 U3.1 | length 39.7
  Bottom Layer w0.254: R4.2@20.718,18.94 R4.2
  Bottom Layer w0.635: U3.1 19.9,18.94 R4.2@20.718,18.94 ; R4.2 24.081,21.928 24.081,43.867 R3.1
VCC: C1.2 C2.2 C3.2 C6.2 C7.2 C8.2 C12.1 DIS1.5 DIS2.2 ENC.4 pow.1 R1.2 R2.2 R3.2 TOF.4 U1.4 U1.6 U1.18 U2.4 U2.6 U2.18 U3.2 | length 305
  Top Layer w0.254: ENC.4 ENC.4@5.238,26.94 ; U3.2@14.417,26.94 U3.2 ; R3.2 R3.2@21.102,37.042 ; C7.2 30.244,29.028 32.816,31.599 33.817,31.599 U2.6 ; C6.2 30.619,35.088 32.444,33.263 U2.4 ; U2.18 44.09,30.863 44.69,31.463 C8.2 C8.2@45.953,31.477 ; C1.2 53.412,35.088 55.237,33.263 U1.4 ; C2.2@53.412,28.091 53.76,28.439 53.76,29.347 55.957,31.544 56.027,31.544 56.146,31.663 U1.6 ; R1.2 R1.2@59.639,44.796 ; U1.18 67.043,30.863 67.643,31.463 C3.2 70.504,31.463 ; 79.54,54.909 79.905,55.273 DIS1.5
  Top Layer w0.635: ENC.4 2.618,29.537 2.618,47.398 6.555,51.335 39.575,51.335 48.338,42.572 ; TOF.4 10.111,41.261 ; C12.1 12.27,24.792 14.417,26.94 5.238,26.94 10.111,31.812 10.111,41.261 ; R3.2@21.102,37.042 27.891,37.042 ; C7.2 26.116,28.091 20.906,33.301 R3.2 17.483,37.042 13.264,41.261 10.111,41.261 ; C6.2 28.291,37.042 27.891,37.042 ; R2.2 33.181,44.521 27.891,39.231 27.891,37.042 ; C8.2@45.953,31.477 47.657,31.477 47.83,31.65 ; 48.592,38.254 51.696,35.15 52.975,35.15 C1.2 ; C2.2@53.412,28.091 C2.2 51.389,28.091 47.83,31.65 ; R1.2 51.175,44.521 49.227,42.572 48.338,42.572 ; R1.2@59.639,44.796 66.814,51.97 ; 61.893,46.775 65.979,46.775 75.139,37.615 75.139,31.835 ; pow.1 69.752,54.909 66.814,51.97 ; 70.504,31.463 74.767,31.463 75.139,31.835 ; 79.54,54.909 76.602,51.97 66.814,51.97 ; DIS2.2 77.861,29.113 75.139,31.835 ; 47.83,31.65 48.338,32.158 48.338,42.572
pads on no net: J3. J6. U1.19 U1.20 U1.22 U2.12 U2.13 U2.14 U2.19 U2.20 U2.22 U2.23 U2.24 U2.25 U2.26

## Polygon pours and split planes (outlines as drawn)
GND on Bottom Layer "NONET_L-01_P-001" (solid, pour order 0): 0.395,63.781 0.395,64.988 87.962,65.499 87.962,0.599 81.612,0.599 0.395,0.599 0.395,63.21

## Silkscreen, mask and mechanical layers (free items; w line width, h text height)
Bottom Overlay:
  drawing of 29 lines, arcs and shapes, not listed
Mechanical 1:
  the board outline again, w0.254